# Altium PCB DCDC.PcbDoc
Units mm, origin at the board's own origin, x right, y up, seen from the top; angles counter-clockwise.
Board outline 202 x 69.32 mm, 2 copper layers (Top Layer, Bottom Layer); 14 components, 8 nets, 72 pads, 0 vias.
Unrouted connection lines stored in the file: 4.
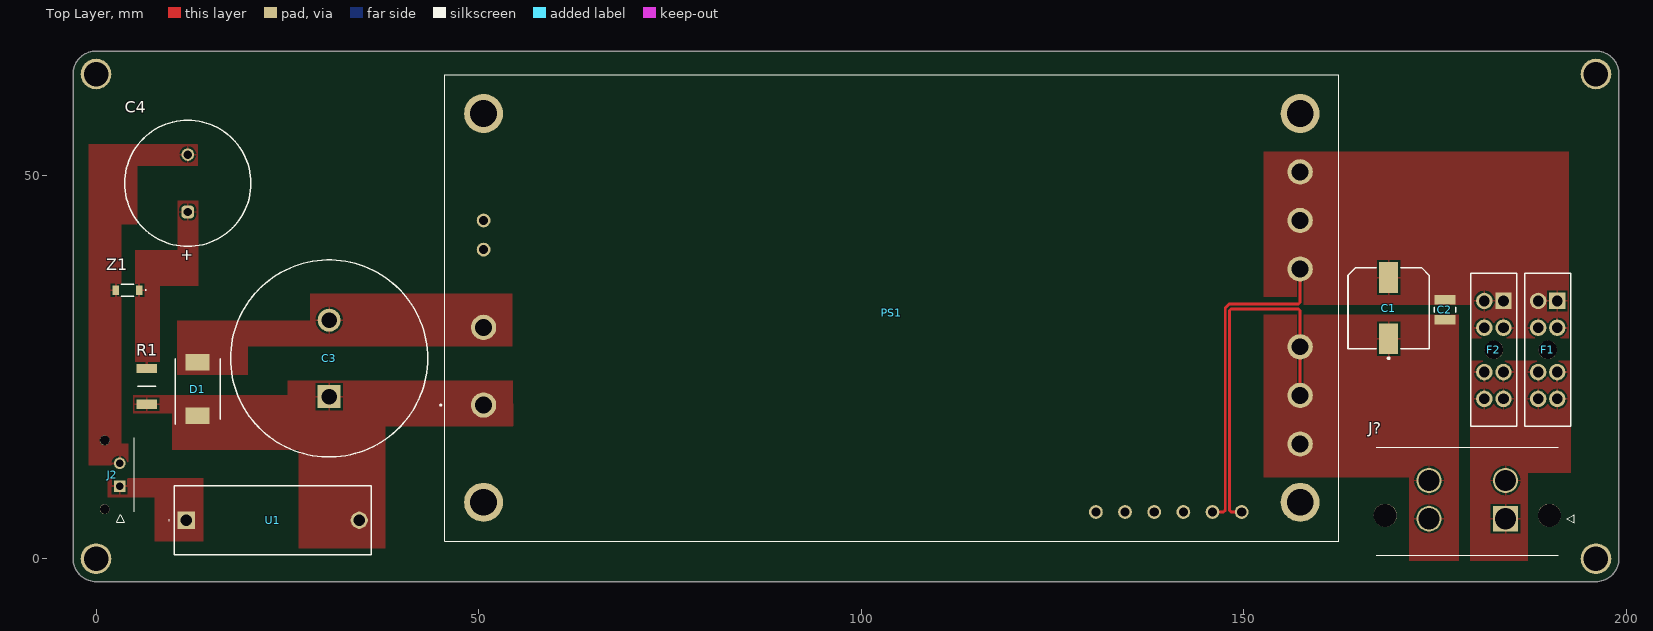
[diagram p0: Top Layer view]
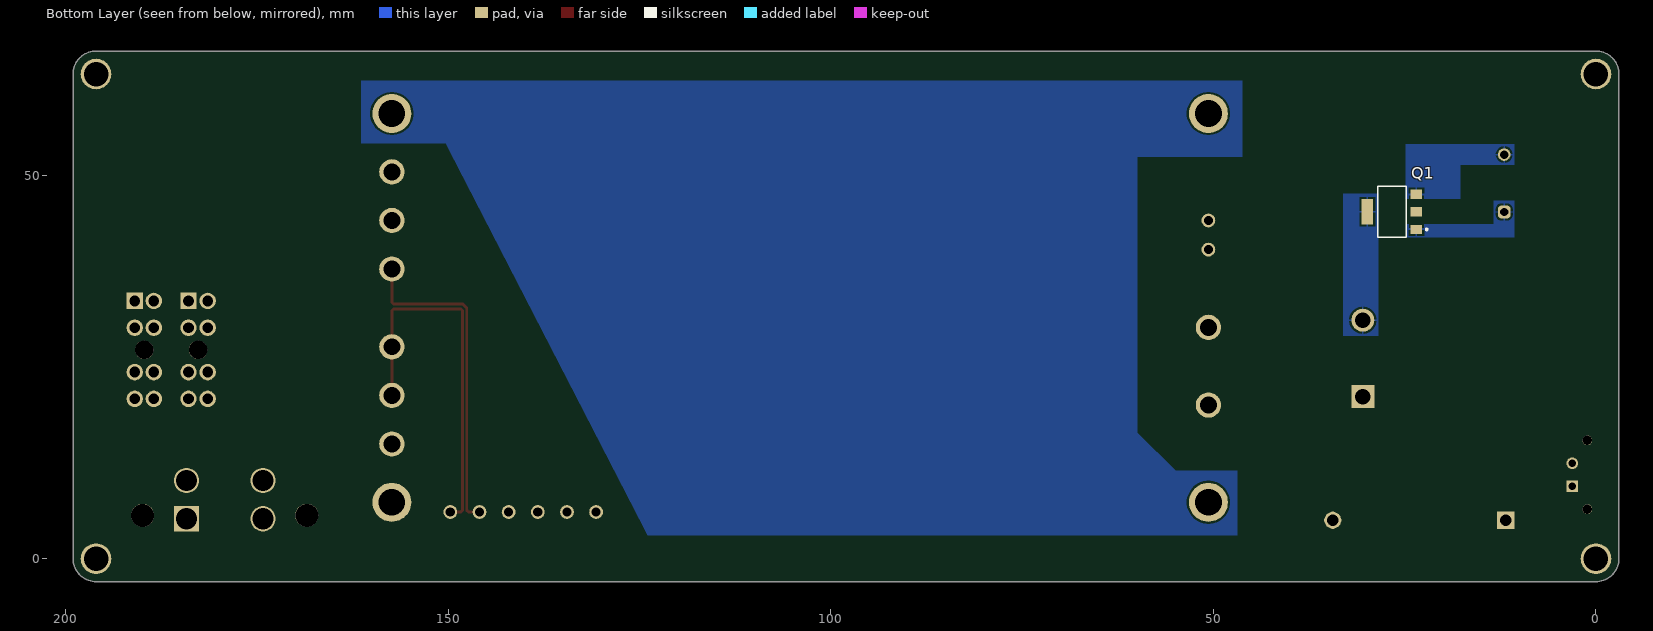
[diagram p1: Bottom Layer view, seen from below]
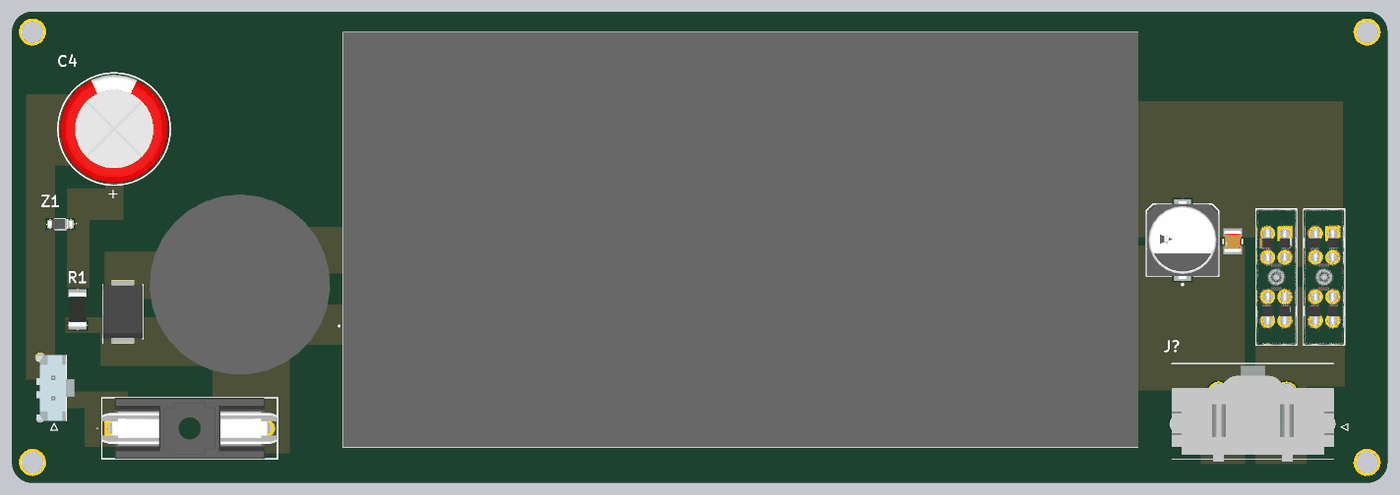
[diagram p2: 3D render of the assembled board from above, using the file's embedded part models]

## Layer stack, top to bottom
Top Solder: solder mask 0.0102, Solder Resist, Dk 3.5
Top Layer: signal copper 0.0356
Dielectric 1: dielectric 0.32, FR-4, Dk 4.8
Bottom Layer: signal copper 0.0356
Bottom Solder: solder mask 0.0102, Solder Resist, Dk 3.5

## Board outline
-3,0 -3,63.324 cw(c0,63.324) 0,66.324 196,66.324 cw(c196,63.324) 199,63.324 199,0 cw(c196,0) 196,-3 195.207,-3 11.698,-3 0,-3 cw(c0,0)

## Design rules (kind name [scope] priority, off if disabled: settings)
Clearance [All] p1: gap=0.254 ignorepadtopadclearanceinfootprint=TRUE except(0: Arc-Hole Track-Hole SMDPad-Hole THPad-Hole Via-Hole Fill-Hole Poly-Hole Region-Hole Text-Hole; 0.127: Arc-Arc Arc-Track Track-Track SMDPad-SMDPad; 0.33: Arc-THPad Track-THPad; 0.5: THPad-THPad)
DiffPairsRouting [All] p1: maxlimit=0.254 minlimit=0.09 mostfreqgap=0.254 toplayer_minwidth=0.2 toplayer_maxwidth=0.381 toplayer_prefwidth=0.381 bottomlayer_minwidth=0.2 bottomlayer_maxwidth=0.381 bottomlayer_prefwidth=0.381 maxuncoupledlength=12.7
HoleSize [All] p1: absolutevalues=TRUE maxlimit=6.3 minlimit=0.15 maxpercent=80.000 minpercent=20.000
HoleToHoleClearance [All] p1: gap=0.5 allowstackedmicrovias=TRUE
MinimumAnnularRing MinimumAnnularRing_1 [IsVia] p1: minimumring=0.05
MinimumAnnularRing [All] p2: minimumring=0.13
PolygonConnect [All] p1: connectstyle=Relief reliefconductorwidth=0.254 reliefentries=4 polygonreliefangle="90 Angle" airgapwidth=0.254
RoutingVias [All] p1: holewidth=0.711 width=1.27 viastyle="Through Hole" minholewidth=0.15 minwidth=0.25 maxholewidth=0.711 maxwidth=1.27
SilkToSolderMaskClearance [IsPad] p1: minsilkscreentomaskgap=0.15 clearancetoexposedcopper=TRUE
SolderMaskExpansion [All] p1: expansion=0.102 istentingtop=FALSE
UnRoutedNet [All] p1: checkbadconnections=TRUE
Width [All] p1: maxlimit=0.254 minlimit=0.09 preferedwidth=0.254 minimp=50.000000 maximp=50.000000 favimp=50.000000
25 further rules are at their usual default settings.

## Classes and differential pairs
differential pair LV: +LV_P -LV_N

## Components (designator, comment, footprint, x,y, rotation, side; value= is the part's Value field where it differs from the comment)
C1 "MAL215371101E3" FP-MAL215371101E3-MFG 168.899,32.733 r90 top
C2 "C1210C476M4PACTU" FP-C1210C476M4PACTU-MFG 176.272,32.527 r270 top
C3 "LLG2W331MELA45" CAPPRD1000W180D2575H4700 30.46,21.162 r90 top
C4 "860021380020" WCAP-ATG5_D16H31.5 11.991,49.045 r270 top
D1 "SMCJ440A_TR13" DIOM7959X280N 13.28,22.161 r90 top
F1 "178.6165.0002" FP-178_6165-MFG 189.693,27.276 r270 top
F2 "178.6165.0002" FP-178_6165-MFG 182.666,27.276 r270 top
J2 "436500227" 4365002YY_272829 3.088,9.452 r270 top
J? "42819-2243" 42819-2XXY_2 184.183,5.21 r0 top
PS1 "CFB600-300S24" CFB600300S24 50.644,20.063 r0 top
Q1 "STN3N45K3" FP-SOT-223-0046067-MFG 26.669,45.317 r0 bottom
R1 "CRCW2010200KFKEFHP" RESC5025X70N 6.633,22.513 r90 top
U1 "64600001003" 64600001003 11.793,5.015 r0 top
Z1 "KDZLV62" KDZLV110 4.096,35.071 r270 top

## Footprints (in the part's own frame and the unit in brackets; to place one, negate y for a bottom-side part, rotate by r counter-clockwise, add the part's x,y. Pads: shape width x height; smd on the part's side, far side on the other; paste and mask are expansions set on the pad)
42819-2XXY_2 [mm]
  rect 3.3x3.3 hole 2.8: 1(0,0)
  round 3.3 hole 2.8: 2(0,5) 3(-10,0) 4(-10,5)
  round 3 hole 3 unplated: 5(5.73,0.45) 6(-15.73,0.45)
  silkscreen extent -16.91,-4.76 9,9.34, body extent -16.86,-5.06 6.96,9.04, height 20.95
4365002YY_272829 [mm]
  rect 1.52x1.52 hole 1.02: 1(0,0)
  round 1.52 hole 1.02: 2(-3,0)
  round 1.27 hole 1.27 unplated: 3(3,-1.96) 4(-6,-1.96)
  silkscreen extent -6.32,-0.4 4.7,1.89, body extent -6.32,-2.51 3.32,3.06, height 10.01
64600001003 [mm]
  rect 2.25x2.25 hole 1.5: 1(0,0)
  round 2.25 hole 1.5: 2(22.6,0)
  silkscreen extent -2.3,-4.5 24.2,4.5, body extent -1.6,-4.5 24.2,4.5, height 12
CAPPRD1000W180D2575H4700 [mm]
  rect 3x3 hole 2: 1(0,0)
  round 3 hole 2: 2(10,0)
  silkscreen extent -7.87,-12.88 17.87,12.88, body extent -8.23,-13.24 18.25,13.24, height 47
CFB600300S24 [mm]
  round 3.3 hole 2.2: 1(0,0) 2(0,10.16) 5(106.7,30.48) 6(106.7,24.13) 7(106.7,17.78) 8(106.7,7.62) 9(106.7,1.27) 10(106.7,-5.08)
  round 1.8 hole 1.2: 3(0,20.32) 4(0,24.13) 11(99.06,-13.97) 12(95.25,-13.97) 13(91.44,-13.97) 14(87.63,-13.97) 15(83.82,-13.97) 16(80.01,-13.97)
  round 5.1 hole 3.5: MH1(106.7,38.1) MH2(0,38.1) MH3(0,-12.7) MH4(106.7,-12.7)
  silkscreen extent -5.7,-17.8 111.74,43.2, body extent -5.06,-17.8 111.74,43.2, height 12.8
DIOM7959X280N [mm]
  rect 2.2x3.15 smd: 1(-3.5,0) 2(3.5,0)
  silkscreen extent -4.6,-2.95 3.97,2.95, body extent -3.97,-2.95 3.97,2.95, height 2.8
FP-178_6165-MFG [mm]
  round 2.15 hole 1.4 paste-2539.97 mask+0: 1(-6.4,-1.25) 1(-2.9,1.25) 1(-2.9,-1.25) 2(2.9,1.25) 2(2.9,-1.25) 2(6.4,-1.25) 2(6.4,1.25)
  rect 2.15x2.15 hole 1.4 paste-2539.97 mask+0: 1(-6.4,1.25)
  round 2.4 hole 2.4 unplated paste-2539.97 mask+0: ""(0,0)
  silkscreen extent -10,-3 10,3, body extent -10.1,-3.1 10.1,3.1, height 0.25
FP-C1210C476M4PACTU-MFG [mm]
  rect 1.2x2.7 smd paste+0 mask+0: 1(-1.3,0) 2(1.3,0)
  silkscreen extent -0.33,-1.4 0.33,1.4, body extent -2,-1.5 2,1.5, height 0.25
FP-MAL215371101E3-MFG [mm]
  rect 4x2.5 smd paste+0 mask+0: 1(-4,0) 2(4,0)
  silkscreen extent -6.67,-5.3 5.3,5.3, body extent -6.25,-5.55 6.25,5.55, height 0.25
FP-SOT-223-0046067-MFG [mm]
  rect 1.5x1.2 smd paste+0 mask+0: 1(-3.2,2.3) 2(-3.2,0) 3(-3.2,-2.3)
  rect 1.5x3.3 smd paste+0 mask+0: 4(3.2,0)
  silkscreen extent -4.67,-3.35 1.85,3.35, body extent -3.5,-3.25 3.5,3.25, height 1.8
KDZLV110 [mm]
  rect 1.2x0.85 smd: 1(0,1.525) 2(0,-1.525)
  silkscreen extent -0.8,-0.8 0.8,2.45, body extent -0.8,-1.75 0.8,1.75, height 0.8
RESC5025X70N [mm]
  rect 1.2x2.7 smd: 1(-2.35,0) 2(2.35,0)
  silkscreen extent 0,-1.15 0,1.15, body extent -2.5,-1.25 2.5,1.25, height 0.7
WCAP-ATG5_D16H31.5 [mm] "Aluminum Electrolytic Capacitors, 16x31.5mm"
  rrect50% 1.65x1.65 hole 1.1: 1(3.75,0)
  round 1.65 hole 1.1: 2(-3.75,0)
  silkscreen extent -8.25,-8.25 8.25,8.25, body extent -7.99,-8 8,8, height 31.81

## Part data
C1: library part CMP-02412-000013-1, "CAP ALUM 100UF 20% 50V SMD", Capacitance=100uF, Case/Package=Radial, Dielectric Material=Aluminium, ESR (Equivalent Series Resistance)=300mR, Max Operating Temperature=105°C, Min Operating Temperature=-55°C, Package Quantity=500, Ripple Current=320mA, Tolerance=20%, Voltage Rating=50V, Construction=Cylindrical, Contact Plating=Tin, Diameter=10mm, Height=10mm, Height - Seated (Max)=0.413inch, Lead Free="Lead Free", Life (Hours)=3000Hour, Mount="Surface Mount", Number of Pins=2, Packaging="Tape and Reel", Polarity=Polar, Radiation Hardening=No, Ripple Current (AC)=320mA, RoHS Compliant=Yes, Series="153 CRV", Termination=SMD/SMT, Voltage Rating (DC)=50V
C2: library part CMP-2000-06020-2, "CAP CER 47UF 16V X5R 1210", Capacitance=47uF, Case Code (Imperial)=1210, Case Code (Metric)=3225, Dielectric=X5R, Dielectric Material=Ceramic, Max Operating Temperature=85°C, Min Operating Temperature=-55°C, Package Quantity=1, Tolerance=20%, Voltage=16V, Case/Package=1210, Contact Plating=Tin, Depth=2.5mm, Dissipation Factor=10%, Height=2.5mm, Lead Free="Lead Free", Length=3.2mm, Mount="Surface Mount", Number of Pins=2, Packaging="Tape and Reel", Radiation Hardening=No, REACH SVHC="No SVHC", RoHS Compliant=Yes, Series=C, Termination=SMD/SMT, Thickness=0.11inch, Voltage Rating=16V, Voltage Rating (DC)=16V, Width=0.098inch
C3: "Capacitor Polarised", Manufacturer_Name=Nichicon, Mouser Part Number=647-LLG2W331MELA45, Datasheet Link=https://componentsearchengine.com/Datasheets/1/LLG2W331MELA45.pdf, Height=47mm, Manufacturer_Part_Number=LLG2W331MELA45, Mouser Price/Stock=https://www.mouser.com/Search/Refine.aspx?Keyword=647-LLG2W331MELA45
C4: library part CMP-207834-000009-2, "CAP ALUM 100UF 20% 400V RADIAL", Capacitance=100µF, Case/Package=Radial, Leakage Current=1.2mA, Max Operating Temperature=105°C, Min Operating Temperature=-25°C, Ripple Current=520mA, Tolerance=20%, Voltage Rating=400V, Diameter=16mm, Dissipation Factor=15%, Height=31.5mm, Height - Seated (Max)=32.9946mm, Lead Pitch=7.493mm, Length=31.5mm, Life (Hours)=2000hours, Mount="Through Hole", NexarPartId=54007326, Packaging="Tape & Box (TB)", Pitch=7.5mm, Polarity=Polar, REACH SVHC=Unknown, RoHS=Compliant, Voltage Rating (DC)=400V
D1: "Diode", Manufacturer_Name=YAGEO, Manufacturer_Part_Number=SMCJ440A/TR13, Mouser Part Number=603-SMCJ440A/TR13, Datasheet Link=https://componentsearchengine.com/Datasheets/2/SMCJ440A_TR13.pdf, Height=2.8mm, Mouser Price/Stock=https://www.mouser.co.uk/ProductDetail/YAGEO/SMCJ440A-TR13?qs=PzGy0jfpSMvGLgltNRkuCg%3D%3D
F1 F2: library part CMP-08604-000022-1, "FUSE HOLDER BLADE 80V PCB", Manufacturer=Littelfuse, Package=178.6165, Voltage Rating Ac=80V, Automotive=No, Category=Fuse, ComponentLink2Description=Datasheet, ComponentLink2URL=https://www.littelfuse.com/~/media/commercial-vehicle/datasheets/automotive-fuse-holders/ato/littelfuse-fuse-holder-ato-flr-pcb-datasheet.pdf, Conn Orientation=Vertical, Device Class L1="Circuit Protection", Device Class L2="Fuse Holders", Device Class L3=unset, Digikey Description="FUSE HOLDER BLADE 80V PCB", Height=17.5mm, Lead Free=Yes, Manufacturer Part Number=178.6165.0002, Mouser Description="Fuse Holder FLR (ATO) PCB 4-pin Holder", Number Of Fuses=1, Octopart=https://octopart.com/178.6165.0002-littelfuse-13138759, RoHS=TRUE, Standoff Height=1mm, Voltage Rating DC=80V
J2: "Connector", Manufacturer_Name=Molex, Datasheet Link=https://www.molex.com/pdm_docs/sd/436500227_sd.pdf, Height=9.9mm, Manufacturer_Part_Number=436500227
J?: "Connector", Manufacturer_Name=Molex, Mouser Part Number=538-42819-2243, Datasheet Link=https://www.molex.com/pdm_docs/sd/428192214_sd.pdf, Height=21mm, Manufacturer_Part_Number=42819-2243, Mouser Price/Stock=https://www.mouser.com/Search/Refine.aspx?Keyword=538-42819-2243
PS1: "Power Supply", Manufacturer_Name=Cincon, Mouser Part Number=418-CFB600-300S24, Datasheet Link=https://www.cincon.com.tw/productdownload/SPEC-CFB600W-110S%20series%20V10.pdf, Height=12.7mm, Manufacturer_Part_Number=CFB600-300S24, Mouser Price/Stock=https://www.mouser.co.uk/ProductDetail/Cincon/CFB600-300S24?qs=UPLqB4C8V4FDbCNWWjqKEg%3D%3D
Q1: library part CMP-12198-000029-1, "MOSFET N-CH 450V 0.6A SOT-223", Case/Package=SOT-223, Continuous Drain Current (ID)=600mA, Drain to Source Breakdown Voltage=450V, Drain to Source Resistance=3.8R, Gate to Source Voltage (Vgs)=30V, Input Capacitance=150pF, Max Operating Temperature=150°C, Max Power Dissipation=2W, Min Operating Temperature=-55°C, Package Quantity=1, Threshold Voltage=3.75V, Drain to Source Voltage (Vdss)=450V, Element Configuration=Single, Height=1.8mm, Lead Free="Lead Free", Length=6.7mm, Mount="Surface Mount", Number of Elements=1, Number of Pins=4, On-State Resistance=3.8R, Packaging="Tape and Reel", Power Dissipation=2W, Radiation Hardening=No, Rds On Max=3.8R, REACH SVHC="No SVHC", Width=3.7mm
R1: "Resistor", Manufacturer_Name=Vishay, Mouser Part Number=71-CRCW2010200KFKEFH, Datasheet Link=https://www.mouser.at/datasheet/2/427/crcwhpe3-1713858.pdf, Height=0.7mm, Manufacturer_Part_Number=CRCW2010200KFKEFHP, Mouser Price/Stock=https://www.mouser.co.uk/ProductDetail/Vishay-Dale/CRCW2010200KFKEFHP?qs=40TFAHZMFvfjgaRhi0IFFA%3D%3D
U1: "Undefined or Miscellaneous", Manufacturer_Name=LITTELFUSE, Mouser Part Number=576-64600001003, Arrow Part Number=64600001003, Arrow Price/Stock=https://www.arrow.com/en/products/64600001003/littelfuse?region=europe, Datasheet Link=https://www.littelfuse.com/~/media/electronics/datasheets/fuse_blocks/littelfuse_fuse_block_646_datasheet.pdf.pdf, Height=12mm, Manufacturer_Part_Number=64600001003, Mouser Price/Stock=https://www.mouser.co.uk/ProductDetail/Littelfuse/64600001003?qs=J2dJc02fMkr9fpR3CPjt3Q%3D%3D
Z1: "Zener Diode", Manufacturer_Name="ROHM Semiconductor", Mouser Part Number=N/A, Datasheet Link=https://fscdn.rohm.com/en/products/databook/datasheet/discrete/diode/zener/kdzlvtr62-e.pdf, Height=0.8mm, Manufacturer_Part_Number=KDZLV62, Mouser Price/Stock=https://www.mouser.co.uk/ProductDetail/ROHM-Semiconductor/KDZLV62?qs=tlR8i4ZVbUdWvXwciVMM5g%3D%3D

## Free pads (board coordinates)
  round 4 hole 3.2: 39(0,0) 40(0,63.324) 41(196,63.324) 42(196,0)

## Nets (pads, with @x,y where several pads share a name; then routed paths per layer and width w, separated by ;. In a path a pad name is that pad's centre, name@x,y a point inside that pad or via, vN(x,y) a via of type N, cw(c..) or ccw(c..) an arc to the next point about the centre after c; other vN are vias at no path point)
LV_N: C1.1 C2.2 J?.3 J?.4 PS1.8 PS1.9 PS1.10 PS1.11 | length 48.3
  Top Layer w0.381: PS1.11 148.34,6.093 148.117,6.316 148.117,32.41 148.34,32.633 157.121,32.633 157.344,32.41 PS1.8 PS1.9
LV_P: C1.2 C2.1 F1.1 F2.1 PS1.5 PS1.6 PS1.7 PS1.12 | length 42.6
  Top Layer w0.381: PS1.12 147.334,6.093 147.557,6.316 147.557,32.749 148.077,33.268 157.121,33.268 157.344,33.492 157.344,34.861 PS1.7
NetC4_1: C4.1 Q1.1 R1.2 Z1.1
NetC4_2: C4.2 J2.2 Q1.3 Z1.2
NetF1_2: F1.2 F2.2 J?.1 J?.2
NetJ2_1: J2.1 U1.1
Vin+: C3.1 D1.1 PS1.1 R1.1 U1.2
Vin-: C3.2 D1.2 PS1.2 Q1.4
pads on no net: F1. F2. J2.3 J2.4 J?.5 J?.6 PS1.3 PS1.4 PS1.13 PS1.14 PS1.15 PS1.16 PS1.MH1 PS1.MH2 PS1.MH3 PS1.MH4 Q1.2

## Polygon pours and split planes (outlines as drawn)
NetC4_2 on Top Layer "NETC4_2_L01_P026" (solid, pour order 26): 13.297,54.164 13.293,51.365 5.366,51.365 5.366,43.647 3.301,43.669 3.301,15.041 4.219,15.041 4.219,12.18 -0.958,12.18 -0.958,43.647 -0.958,54.164
Vin- on Top Layer "VIN-_L01_P021" (solid, pour order 21): 27.992,34.643 27.992,31.066 10.608,31.066 10.608,24.005 19.856,24.005 19.856,27.77 48.677,27.77 54.399,27.77 54.399,34.643 34.207,34.643
NetC4_1 on Top Layer "NETC4_1_L01_P022" (solid, pour order 22): 8.355,24.187 8.355,35.639 13.347,35.639 13.347,46.745 10.683,46.745 10.683,40.325 5.096,40.325 5.096,24.187
NetJ2_1 on Top Layer "NETJ2_1_L01_P020" (solid, pour order 20): 14.024,10.488 1.51,10.488 1.51,8.037 7.649,8.037 7.649,2.302 14.024,2.302
Vin+ on Top Layer "VIN+_L01_P019" (solid, pour order 19): 26.461,14.21 26.461,1.349 35.304,1.349 37.768,1.349 37.768,17.291 54.543,17.291 54.469,23.277 25.059,23.277 25.059,21.381 4.854,21.381 4.854,19.025 9.977,19.025 9.977,14.21
NetF1_2 on Top Layer "NETF1_2_L01_P014" (solid, pour order 14): 192.722,25.827 192.722,11.217 187.096,11.217 187.096,-0.249 179.564,-0.249 179.564,17.657 179.564,25.827
LV_N on Top Layer "LV_N_L01_P007" (solid, pour order 7): 175.044,31.889 172.837,31.889 152.602,31.889 152.602,10.622 171.582,10.622 171.582,-0.249 178.102,-0.249 178.102,18.92 178.102,31.889 177.378,31.889
LV_P on Top Layer "LV_P_L01_P008" (solid, pour order 8): 192.445,28.785 192.445,53.147 162.26,53.19 162.213,53.142 162.166,53.19 152.576,53.19 152.576,34.209 157.8,34.209 157.8,33.159 179.748,33.159 179.748,28.785
Vin- on Bottom Layer "VIN-_L02_P023" (solid, pour order 23): 28.467,47.709 33.025,47.709 33.025,45.572 33.025,29.145 28.467,29.145
NetC4_2 on Bottom Layer "NETC4_2_L02_P025" (solid, pour order 25): 24.879,47.033 17.719,47.033 17.719,51.438 10.655,51.438 10.655,54.16 24.879,54.16
NetC4_1 on Bottom Layer "NETC4_1_L02_P024" (solid, pour order 24): 24.649,43.697 13.377,43.697 13.377,46.762 10.688,46.762 10.688,41.965 22.16,41.965 24.649,41.965
no net on Bottom Layer "NONET_L02_P011" (solid, pour order 11): 46.253,52.534 46.253,62.463 48.454,62.463 161.376,62.463 161.376,54.31 150.327,54.31 123.918,3.043 46.897,3.043 46.897,11.461 54.942,11.461 59.912,16.431 59.912,52.534

## Silkscreen, mask and mechanical layers (free items; w line width, h text height)
Mechanical 1:
  lines w0.254: -3,0 ccw(c0,0) 0,-3 10,-3 11.698,-3 195.207,-3 196,-3 ccw(c196,0) 199,0 199,63.324 ccw(c196,63.324) 196,66.324 194.511,66.324 10,66.324 0,66.324 ccw(c0,63.324) -3,63.324 -3,0

## Text inside footprints (layer, text, board x,y; h text height)
C4: Top Overlay "+" at 11.241,40.495 h1.5 r270